# Altium PCB Controlador de Strobo.PcbDoc
Units mm, origin at the board's own origin, x right, y up, seen from the top; angles counter-clockwise.
Board outline 30.35 x 40.01 mm, 2 copper layers (Top Layer, Bottom Layer); 5 components, 4 nets, 20 pads, 0 vias.
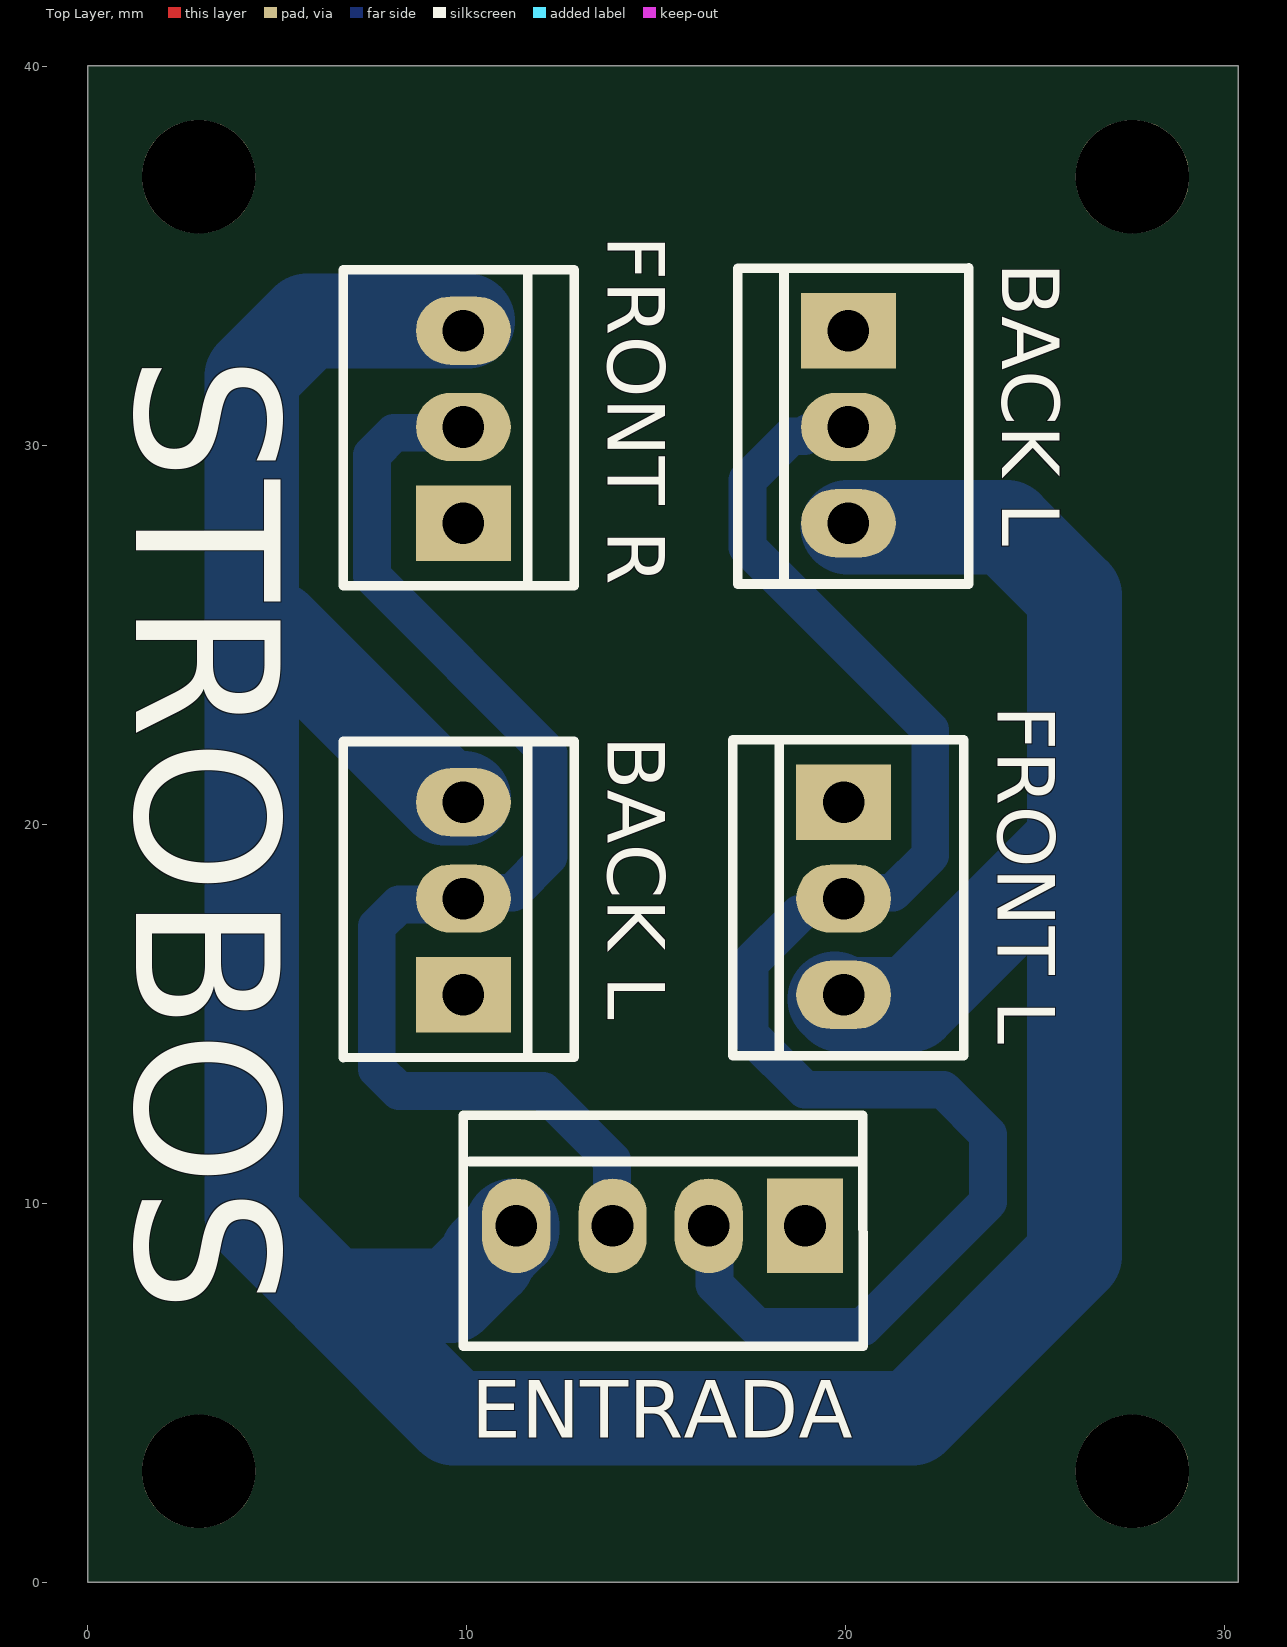
[diagram p0: Top Layer view]
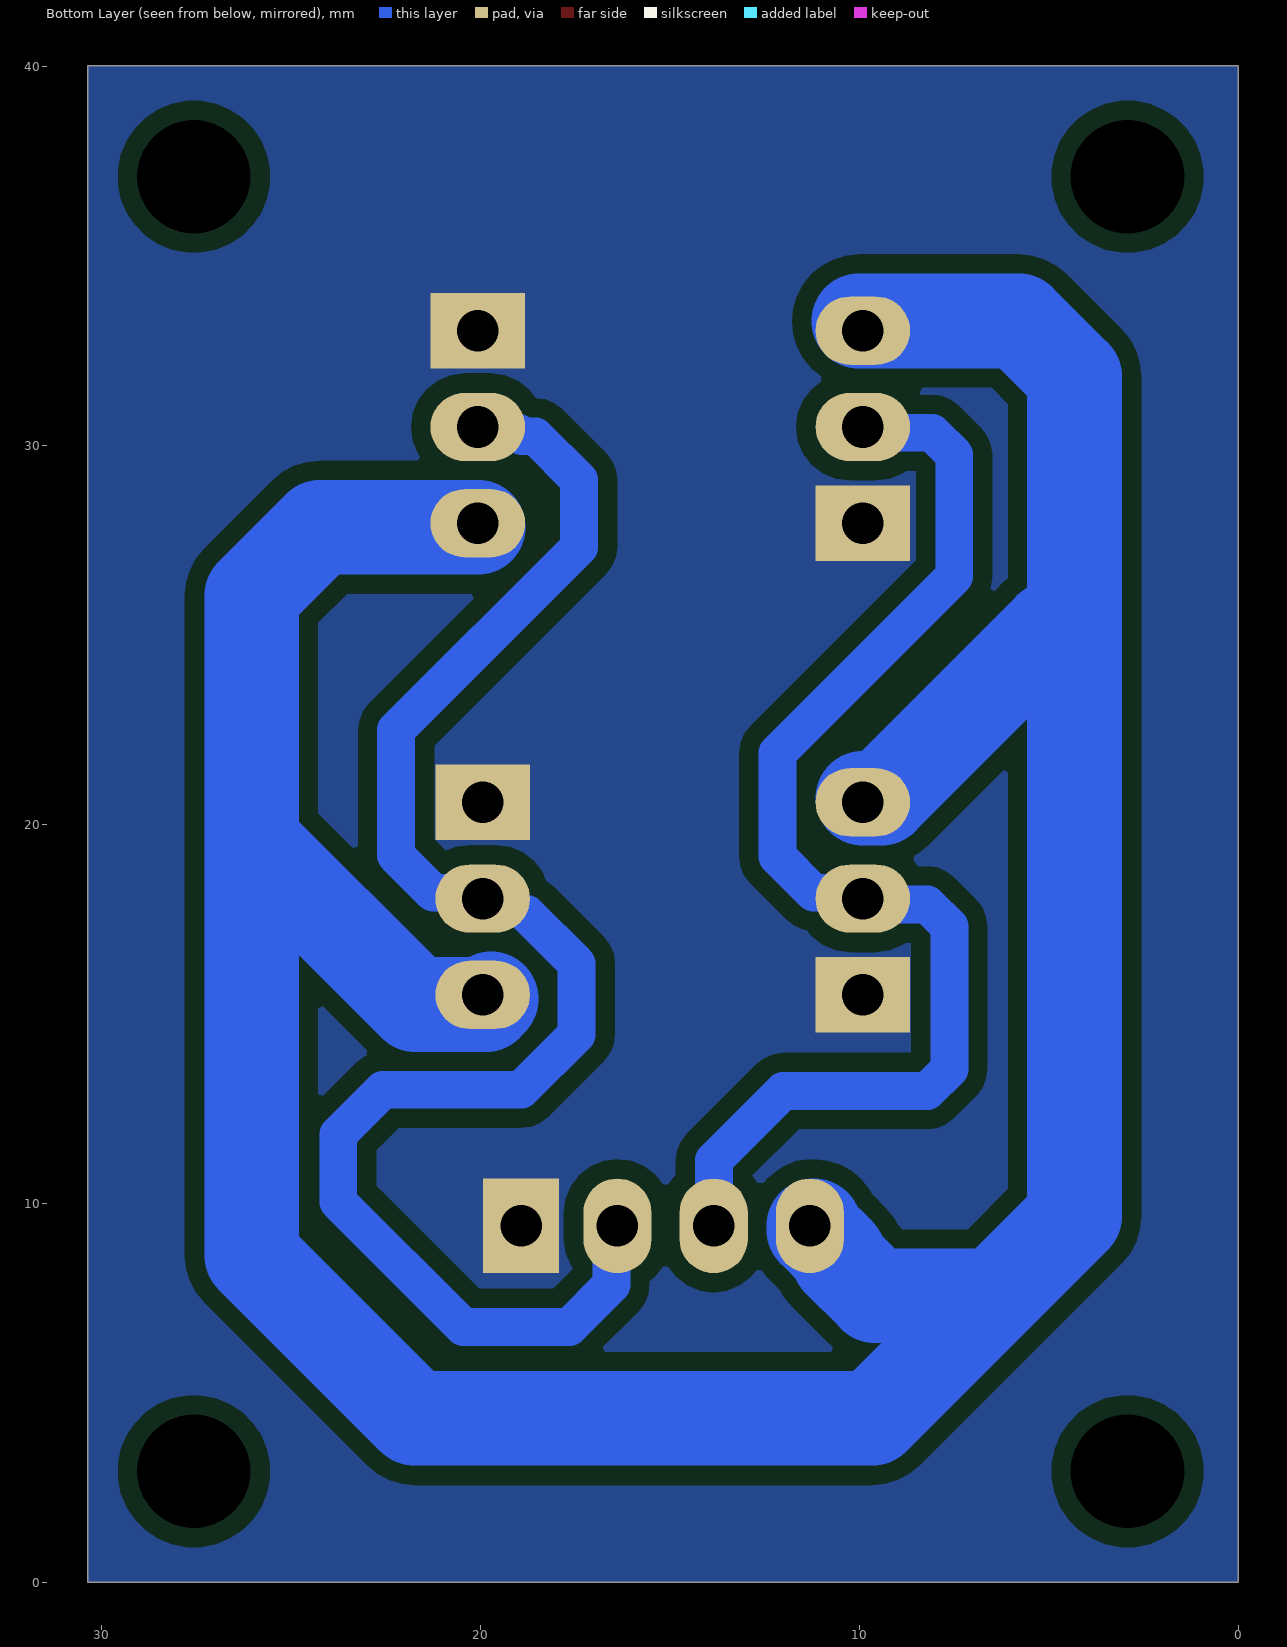
[diagram p1: Bottom Layer view, seen from below]
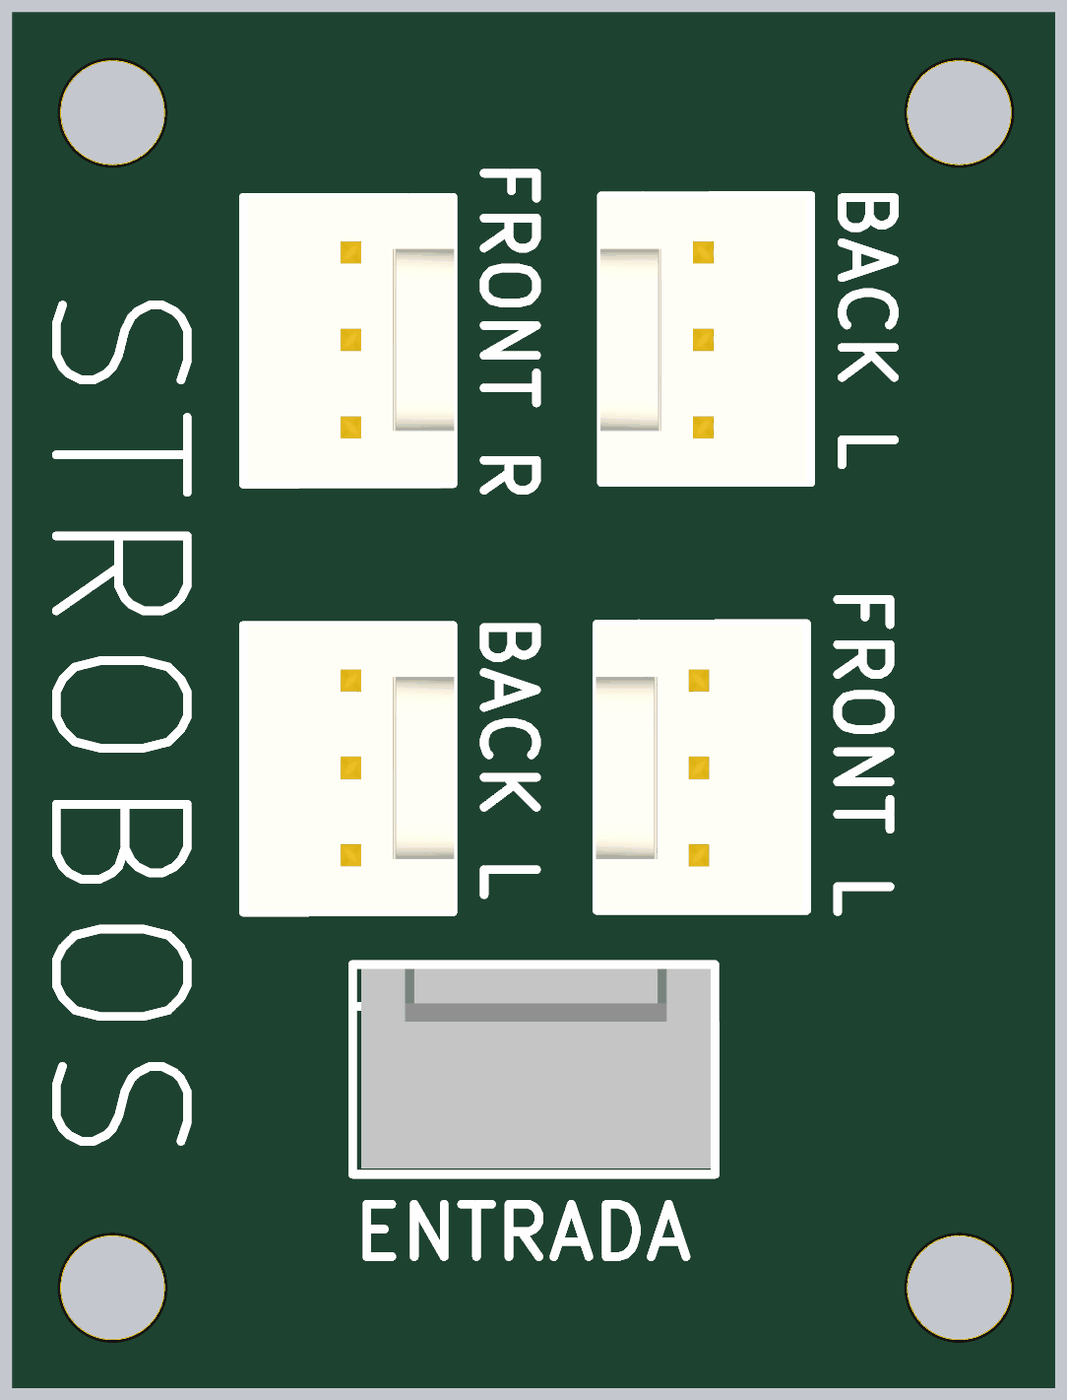
[diagram p2: 3D render of the assembled board from above, using the file's embedded part models]

## Layer stack, top to bottom
Top Solder: solder mask 0.0102, Solder Resist, Dk 3.5
Top Layer: signal copper 0.0356
Dielectric 1: dielectric 0.32, FR-4, Dk 4.8
Bottom Layer: signal copper 0.0356
Bottom Solder: solder mask 0.0102, Solder Resist, Dk 3.5

## Board outline
0,0 30.353,0 30.353,40.005 0,40.005

## Design rules (kind name [scope] priority, off if disabled: settings)
Clearance [All] p1: gap=0.5 ignorepadtopadclearanceinfootprint=FALSE except(0: Arc-Text Arc-Hole Track-Text Track-Hole SMDPad-Text SMDPad-Hole THPad-Text THPad-Hole Via-Text Via-Hole Fill-Text Fill-Hole Poly-Text Poly-Hole Region-Text Region-Hole Text-Text Text-Hole)
ComponentClearance [All] p1: gap=0.3 collisioncheckmode=3 verticalgap=0.254 showdistances=FALSE
HoleSize [All] p1: absolutevalues=TRUE maxlimit=3 minlimit=0.75 maxpercent=80.000 minpercent=20.000
HoleToHoleClearance [All] p1: gap=0.1 allowstackedmicrovias=TRUE
MinimumSolderMaskSliver [All] p1: minsoldermaskwidth=0.05
PolygonConnect [All] p1: connectstyle=Relief reliefconductorwidth=0.254 reliefentries=4 polygonreliefangle="90 Angle" airgapwidth=0.254
RoutingVias [All] p1: holewidth=0.9 width=2 viastyle="Through Hole" minholewidth=0.9 minwidth=2 maxholewidth=0.9 maxwidth=2
SilkToSilkClearance [All] p1: silktosilkclearance=0
SilkToSolderMaskClearance [IsPad] p1: minsilkscreentomaskgap=0 clearancetoexposedcopper=TRUE
SolderMaskExpansion [All] p1: expansion=0.102 istentingtop=FALSE
Width [All] p1: maxlimit=5 minlimit=0.5 preferedwidth=1 minimp=50.000000 maximp=50.000000 favimp=50.000000
24 further rules are at their usual default settings.

## Classes and differential pairs
component class "Controlador Strobo": "BACK L" ENTRADA "FRONT L" "FRONT R"

## Components (designator, comment, footprint, x,y, rotation, side; value= is the part's Value field where it differs from the comment)
"BACK L" "KK_2.54_3vias" KK_3vias_180º 9.906,15.494 r90 top
"BACK L" "KK_2.54_3vias" KK_3vias_180º 20.066,33.02 r270 top
ENTRADA "KK_2.54_4vias" KK_4vias_180° 18.923,9.398 r180 top
"FRONT L" "KK_2.54_3vias" KK_3vias_180º 19.939,20.574 r270 top
"FRONT R" "KK_2.54_3vias" KK_3vias_180º 9.906,27.94 r90 top

## Footprints (in the part's own frame and the unit in brackets; to place one, negate y for a bottom-side part, rotate by r counter-clockwise, add the part's x,y. Pads: shape width x height; smd on the part's side, far side on the other; paste and mask are expansions set on the pad)
KK_3vias_180º [mm]
  rect 2x2.5 hole 1.1: 1(0,0)
  oval 1.8x2.5 hole 1.1: 2(2.54,0) 3(5.08,0)
  silkscreen extent -1.65,-2.92 6.69,3.18, body extent -1.6,-2.95 6.69,3.05, height 11.9
KK_4vias_180° [mm]
  rect 2x2.5 hole 1.1: 1(0,0)
  oval 1.8x2.5 hole 1.1: 2(2.54,0) 3(5.08,0) 4(7.62,0)
  silkscreen extent -1.53,-2.92 9.02,3.18, body extent -1.4,-2.79 8.76,3.01, height 10.12

## Part data
"BACK L" "BACK L" "FRONT L" "FRONT R": "Conector KK 2.54mm 3 vias", Descrição="Conector KK 3 vias com passo 2.54mm", Encapsulamento="PTH - 180º", Modelo="3 vias - 180º", Valor="KK 3 vias 180º"
ENTRADA: "Conector KK 2.54mm 4 vias", Descrição="Conector KK 3 vias com passo 2.54mm", Encapsulamento="PTH - 180º", Modelo="3 vias - 180º", Valor="KK 4 vias 180º"

## Free pads (board coordinates)
  round 3 / inner round 1.8 / far side round 1.8 hole 3: 5(2.921,2.921) 5(2.921,37.084) 5(27.559,2.921) 5(27.559,37.084)

## Nets (pads, with @x,y where several pads share a name; then routed paths per layer and width w, separated by ;. In a path a pad name is that pad's centre, name@x,y a point inside that pad or via, vN(x,y) a via of type N, cw(c..) or ccw(c..) an arc to the next point about the centre after c; other vN are vias at no path point)
+12: "BACK L.3" "FRONT L.3" "FRONT R.3" ENTRADA.4 | length 99.6
  Bottom Layer w2.5: 9.906,20.684 9.415,20.684 4.953,25.146 4.318,25.146 ; 10.016,33.274 5.782,33.274 4.318,31.81 4.318,25.146 ; ENTRADA.4@11.193,9.398 11.193,9.288 10.541,8.636 10.541,8.509 9.589,7.557 6.413,7.557 ; 19.709,15.384 19.853,15.24 21.717,15.24 26.035,19.558 ; 20.056,27.83 24.24,27.83 26.035,26.035 26.035,19.558 ; 4.318,25.146 4.318,9.652 6.413,7.557 ; 6.413,7.557 9.652,4.318 21.742,4.318 26.035,8.611 26.035,19.558
GND: "BACK L.1" "FRONT L.1" "FRONT R.1" ENTRADA.1
S_d_5V: "BACK L.2"@9.906,18.034 "FRONT R.2" ENTRADA.3 | length 33.4
  Bottom Layer w1: 9.906,18.034 10.059,18.187 11.202,18.187 12.156,19.141 12.156,21.88 7.493,26.543 7.493,29.741 8.079,30.327 9.753,30.327 9.906,30.48 ; 10.103,17.881 8.206,17.881 7.62,17.295 7.62,13.54 8.206,12.954 12.006,12.954 13.83,11.13 13.83,9.411 ENTRADA.3
S_e_5V: "BACK L.2"@20.066,30.48 "FRONT L.2" ENTRADA.2 | length 42
  Bottom Layer w1: ENTRADA.2 16.536,9.245 16.536,7.848 17.653,6.731 20.447,6.731 23.749,10.033 23.749,11.811 22.57,12.99 18.921,12.99 17.459,14.452 17.459,16.316 18.777,17.634 ; 19.373,18.034 19.939,18.034 ; 19.939,18.187 21.235,18.187 22.225,19.177 22.225,22.479 17.399,27.305 17.399,29.083 18.55,30.234 18.905,30.234 18.997,30.327 19.913,30.327 20.066,30.48

## Polygon pours and split planes (outlines as drawn)
GND on Bottom Layer "GND_L02_P000" (solid, pour order 0): 0,0 30.353,0 30.353,40.005 0,40.005

## Silkscreen, mask and mechanical layers (free items; w line width, h text height)
Top Overlay:
  text "STROBOS" at 1.27,32.385 h3.81 r270